# Altium PCB exp9(project.).PcbDoc
Units mm, origin at the board's own origin, x right, y up, seen from the top; angles counter-clockwise.
Board outline 152.4 x 101.6 mm, 2 copper layers (Top Layer, Bottom Layer); 42 components, 51 nets, 180 pads, 14 vias.
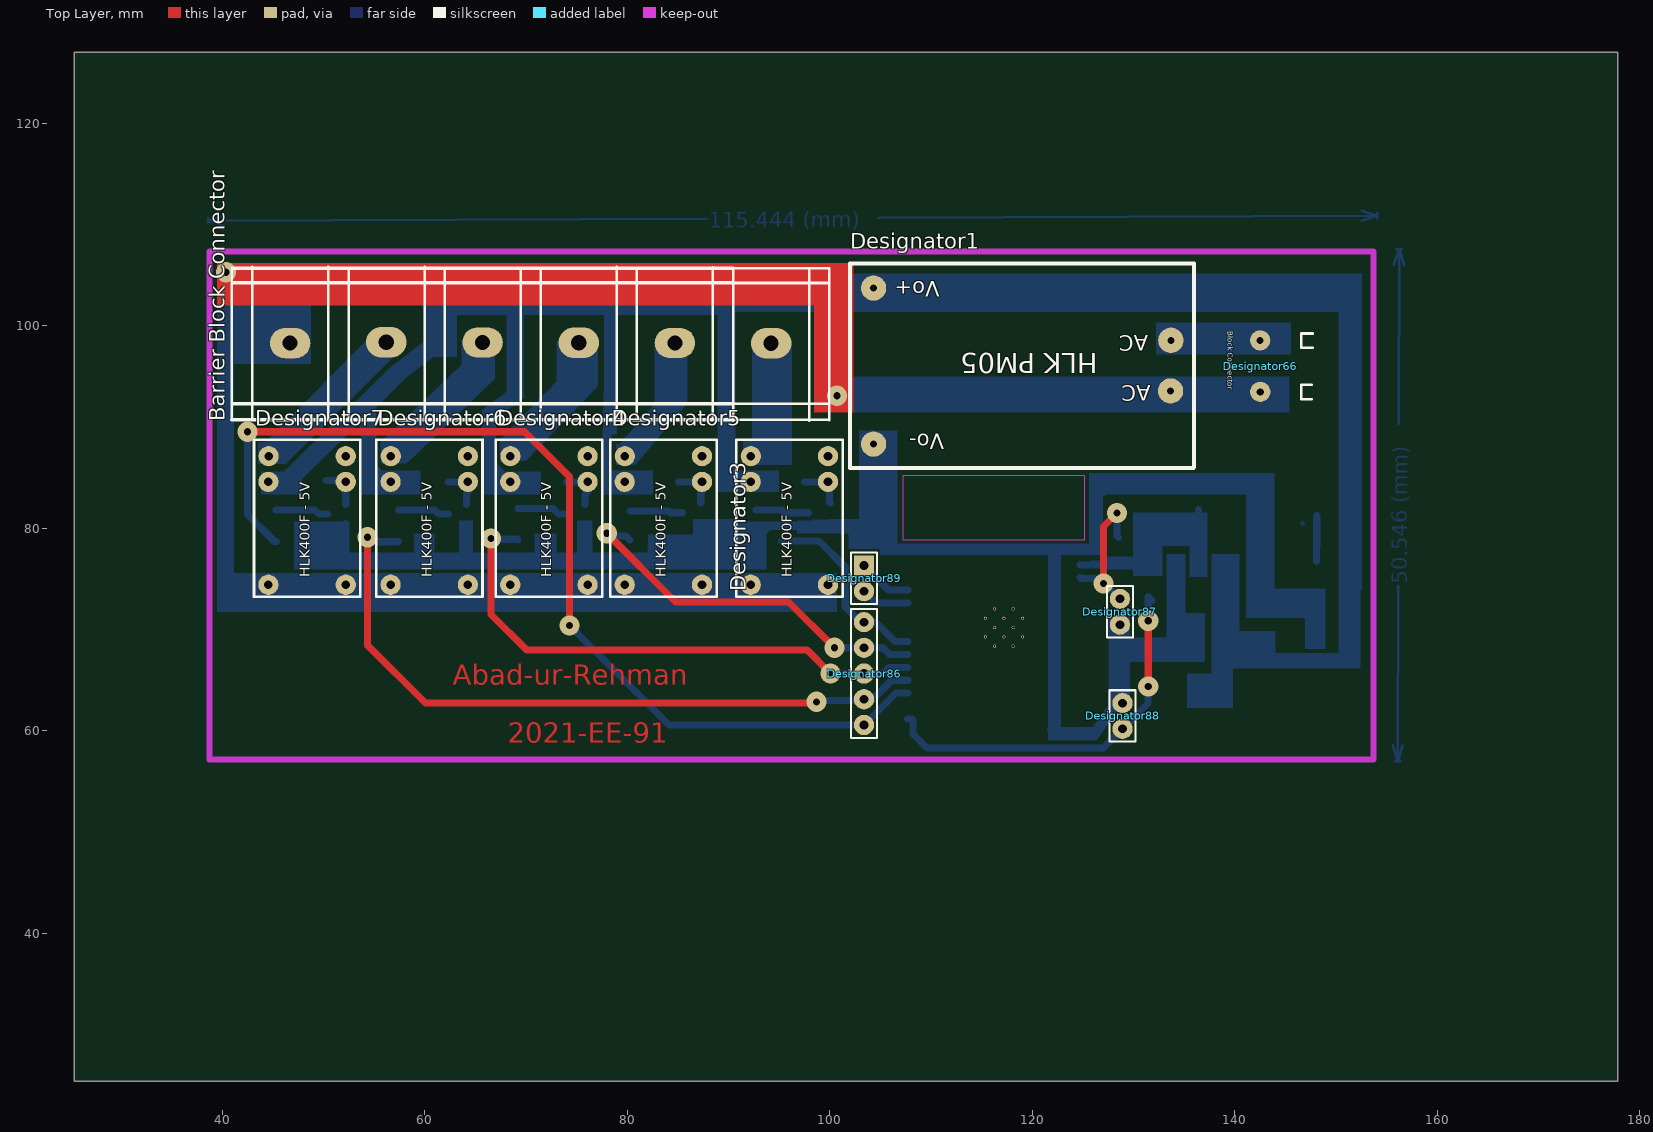
[diagram p0: Top Layer view]
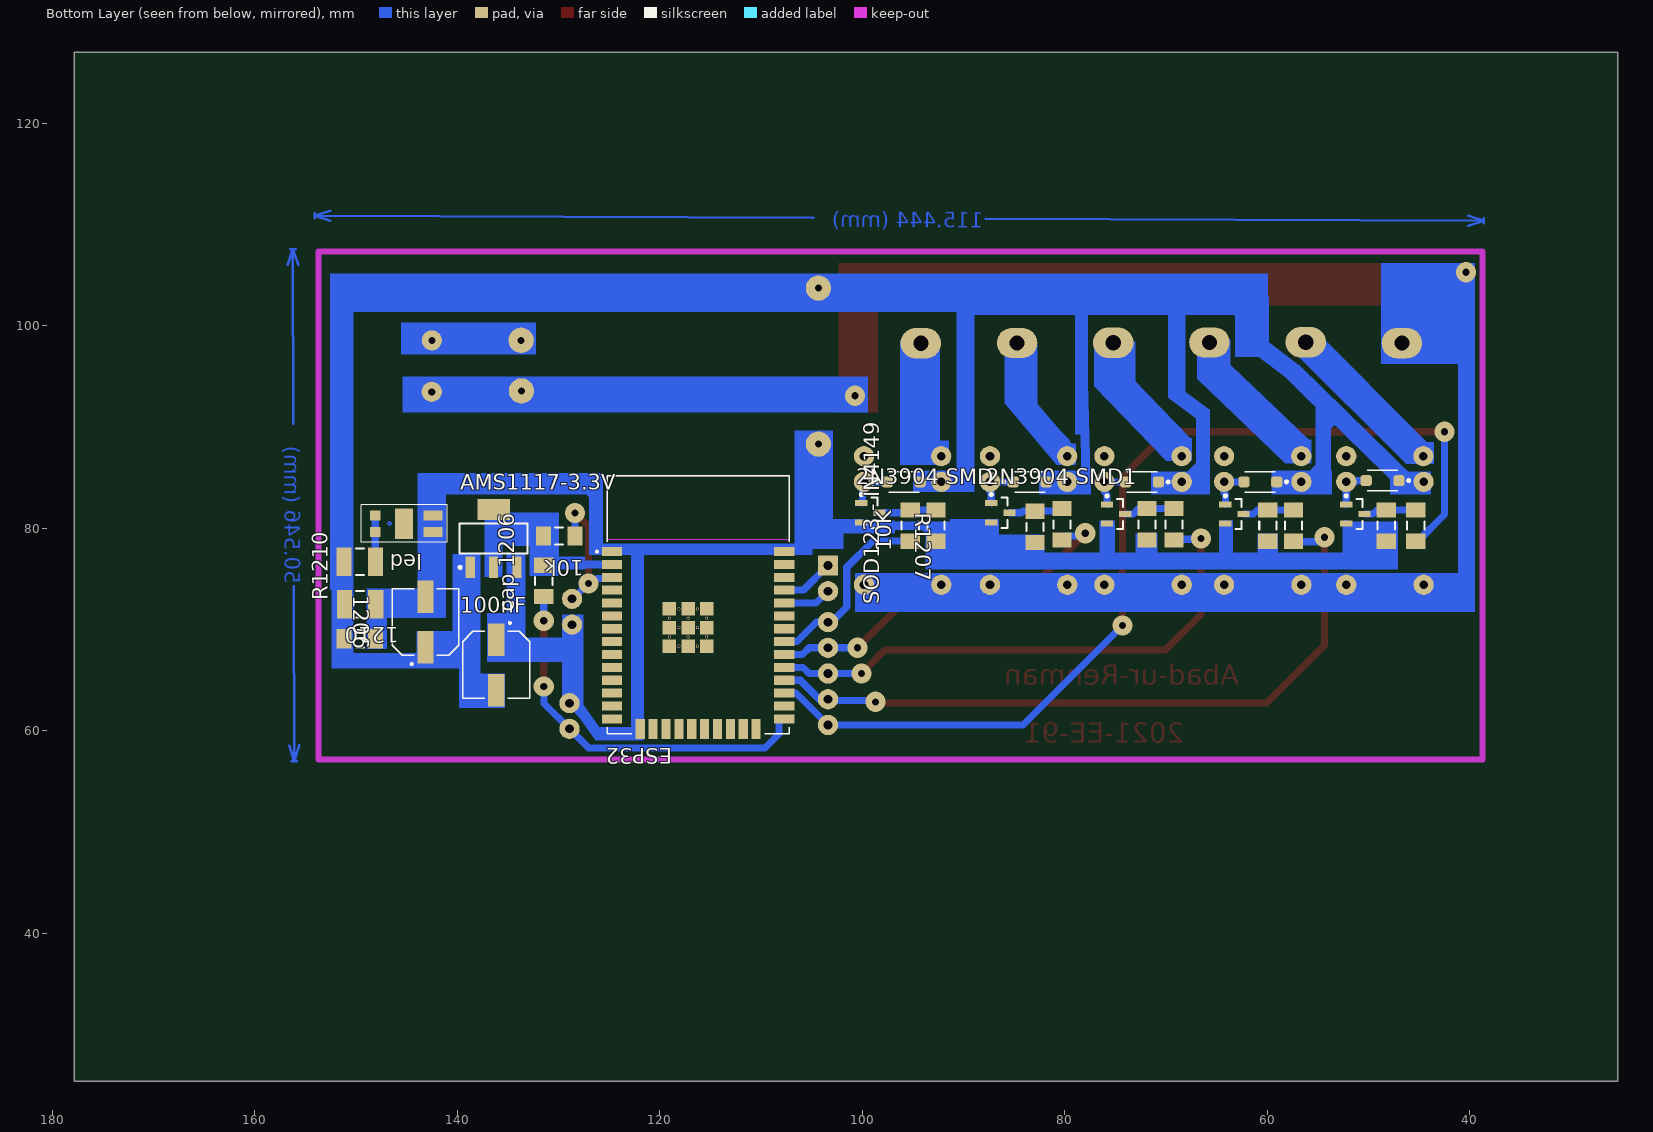
[diagram p1: Bottom Layer view, seen from below]

## Layer stack, top to bottom
Top Solder: solder mask 0.0102, Solder Resist, Dk 3.5
Top Layer: signal copper 0.0356
Dielectric 1: dielectric 0.32, FR-4, Dk 4.8
Bottom Layer: signal copper 0.0356
Bottom Solder: solder mask 0.0102, Solder Resist, Dk 3.5

## Board outline
25.4,25.4 177.8,25.4 177.8,127 25.4,127

## Design rules (kind name [scope] priority, off if disabled: settings)
Clearance [All] p1: gap=0.35 ignorepadtopadclearanceinfootprint=FALSE
PolygonConnect [All] p1: connectstyle=Relief reliefconductorwidth=0.254 reliefentries=4 polygonreliefangle="90 Angle" airgapwidth=0.254
RoutingVias [All] p1: holewidth=0.7 width=2 viastyle="Through Hole" minholewidth=0.7 minwidth=2 maxholewidth=0.7 maxwidth=2
SolderMaskExpansion [All] p1: expansion=0.102 istentingtop=FALSE
Width [All] p1: maxlimit=0.7 minlimit=0.7 preferedwidth=0.7 minimp=50.000000 maximp=50.000000 favimp=50.000000
30 further rules are at their usual default settings.

## Components (designator, comment, footprint, x,y, rotation, side; value= is the part's Value field where it differs from the comment)
"2N3904 SMD" "Comment" SOT23-3L 99.187,81.534 r180 bottom
"2N3904 SMD1" "Comment" SOT23-3L 86.36,81.534 r180 bottom
10k "Comment" RESC3216M 129.921,79.248 r180 bottom
10K "Comment" RESC3216M 95.25,80.264 r270 bottom
100nF "Comment" CAP_EEEHP1H3R3P 136.144,66.508 r270 bottom
1206 "Comment" CAPC3216M 149.606,69.088 r0 bottom
1210 "Comment" CAPC3225M 149.58,72.513 r180 bottom
AMS1117-3.3V "Comment" SOT223-4L 136.398,78.994 r90 bottom
"Barrier Block Connector" "Comment" "Barrier Block Connector" 65.709,98.329 r270 top
"cap 1206" "Comment" CAPC3216M 131.445,74.803 r270 bottom
Designator1 "Comment" HLK-PM05 118.999,96.012 r180 top
Designator3 "Comment" HLK400F-5V 96.004,80.772 r90 top
Designator4 "Comment" HLK400F-5V 72.263,80.772 r90 top
Designator5 "Comment" HLK400F-5V 83.566,80.772 r90 top
Designator6 "Comment" HLK400F-5V 60.452,80.772 r90 top
Designator7 "Comment" HLK400F-5V 48.387,80.772 r90 top
Designator66 "Comment" "PCB Block Connector" 142.748,96.012 r270 top
Designator86 "Comment" HDR1X5 103.378,60.579 r90 top
Designator87 "Comment" HDR1X2#1 128.651,73.025 r270 top
Designator88 "Comment" HDR1X2#1 128.905,62.738 r270 top
Designator89 "Comment" HDR1X2#2 103.378,76.327 r270 top
ESP32 "Comment" MODULE_ESP32-WROOM-32 116.196,72.437 r180 bottom
led "Comment" SMD-LED 145.232,80.46 r0 bottom
R1207 "Comment" RESC3216M 92.71,80.264 r90 bottom
R1210 "Comment" RESC3225M 149.606,76.708 r0 bottom
"SOD123 - IN4149" "Comment" SODFL3718X108N 95.885,84.582 r180 bottom
? "Comment" CAP_EEEHP1H3R3P 143.129,70.739 r90 bottom
? "Comment" SODFL3718X108N 48.641,84.709 r0 bottom
? "Comment" SODFL3718X108N 60.706,84.582 r0 bottom
? "Comment" SODFL3718X108N 72.39,84.582 r0 bottom
? "Comment" RESC3216M 48.26,80.264 r90 bottom
? "Comment" RESC3216M 45.339,80.264 r270 bottom
? "Comment" RESC3216M 59.944,80.264 r90 bottom
? "Comment" RESC3216M 57.404,80.264 r270 bottom
? "Comment" RESC3216M 71.882,80.391 r90 bottom
? "Comment" RESC3216M 69.215,80.391 r270 bottom
? "Comment" RESC3216M 82.931,80.137 r90 bottom
? "Comment" RESC3216M 80.264,80.391 r270 bottom
? "Comment" SOT23-3L 51.308,81.407 r180 bottom
? "Comment" SOT23-3L 63.246,81.407 r180 bottom
? "Comment" SOT23-3L 74.93,81.407 r180 bottom
? "Comment" SODFL3718X108N 83.439,84.582 r180 bottom

## Footprints (in the part's own frame and the unit in brackets; to place one, negate y for a bottom-side part, rotate by r counter-clockwise, add the part's x,y. Pads: shape width x height; smd on the part's side, far side on the other; paste and mask are expansions set on the pad)
"Barrier Block Connector" [mm] "8 pin Barrier Block Connector"
  oval 3x4 hole 1.5: 1(0.056,28.5) 2(0.031,19) 3(0.006,9.5) 4(-0.019,0) 5(-0.044,-9.5) 6(0.044,-19)
  silkscreen extent -7.47,-24.75 7.71,34.25
CAP_EEEHP1H3R3P [mm]
  rect 3.2x1.6 smd: 1(-2.5,0) 2(2.5,0)
  silkscreen extent -4.25,-3.3 3.3,3.3, body extent -3.65,-3.3 3.65,3.3, height 5.8
CAPC3216M [mm] "Chip Capacitor, Body 3.2x1.6mm, IPC Low Density"
  rect 1.5x1.9 smd: 1(-1.55,0) 2(1.55,0)
  silkscreen extent -0.4,-0.85 0.4,0.85, body extent -1.7,-0.9 1.7,0.9, height 1.35
CAPC3225M [mm] "Chip Capacitor, Body 3.2x2.5mm, IPC Low Density"
  rect 1.5x2.8 smd: 1(-1.55,0) 2(1.55,0)
  silkscreen extent -0.4,-1.3 0.4,1.3, body extent -1.7,-1.35 1.7,1.35, height 1.35
HDR1X2#1 [mm]
  round 2 hole 0.85: 1(0,0) 2(2.54,0)
  silkscreen extent -1.27,-1.27 3.81,1.27
HDR1X2#2 [mm]
  rect 2x2 hole 0.85: 1(0,0)
  round 2 hole 0.85: 2(2.54,0)
  silkscreen extent -1.27,-1.27 3.81,1.27
HDR1X5 [mm]
  round 2 hole 0.85: 1(0,0) 2(2.54,0) 3(5.08,0) 4(7.62,0) 5(10.16,0)
  silkscreen extent -1.27,-1.27 11.43,1.27
HLK400F-5V [mm]
  round 2 hole 0.85: "Coil B"(3.81,-3.818) CoilA(3.81,3.818) Common(-6.35,-3.818) Common(-6.35,3.818) NC(6.35,-3.818) NO(6.35,3.802)
  silkscreen extent -7.55,-5.26 7.95,5.24
HLK-PM05 [mm]
  round 2.5 hole 0.7: 0(-14.65,2.45) 1(-14.675,-2.55) 2(14.675,7.7) 3(14.675,-7.7)
  silkscreen extent -16.96,-10.15 17.03,10.07
MODULE_ESP32-WROOM-32 [mm]
  rect 2x0.9 smd: 1(-8.5,5.26) 2(-8.5,3.99) 3(-8.5,2.72) 4(-8.5,1.45) 5(-8.5,0.18) 6(-8.5,-1.09) 7(-8.5,-2.36) 8(-8.5,-3.63) 9(-8.5,-4.9) 10(-8.5,-6.17) 11(-8.5,-7.44) 12(-8.5,-8.71) 13(-8.5,-9.98) 14(-8.5,-11.25) 25(8.5,-11.25) 26(8.5,-9.98) 27(8.5,-8.71) 28(8.5,-7.44) 29(8.5,-6.17) 30(8.5,-4.9) 31(8.5,-3.63) 32(8.5,-2.36) 33(8.5,-1.09) 34(8.5,0.18) 35(8.5,1.45) 36(8.5,2.72) 37(8.5,3.99) 38(8.5,5.26)
  rect 0.9x2 smd: 15(-5.715,-12.25) 16(-4.445,-12.25) 17(-3.175,-12.25) 18(-1.905,-12.25) 19(-0.635,-12.25) 20(0.635,-12.25) 21(1.905,-12.25) 22(3.175,-12.25) 23(4.445,-12.25) 24(5.715,-12.25)
  rect 1.33x1.33 smd: 39_1(-2.835,-0.405) 39_2(-1,-0.405) 39_3(0.835,-0.405) 39_4(-2.835,-2.24) 39_5(-1,-2.24) 39_6(0.835,-2.24) 39_7(-2.835,-4.075) 39_8(-1,-4.075) 39_9(0.835,-4.075)
  round 0.3 hole 0.2: 39_10(-1.918,-0.405) 39_11(-0.083,-0.405) 39_12(-2.835,-1.322) 39_13(-1,-1.322) 39_14(0.835,-1.322) 39_15(-1.918,-2.24) 39_16(-0.083,-2.24) 39_17(-2.835,-3.157) 39_18(-1,-3.157) 39_19(0.835,-3.157) 39_20(-1.918,-4.075) 39_21(-0.083,-4.075)
  Keep-Out Layer region: 9,6.45 -9,6.45 -9,12.75 9,12.75
  Keep-Out Layer region: 9,6.45 -9,6.45 -9,12.75 9,12.75
  silkscreen extent -10.1,-12.75 9,12.75
"PCB Block Connector" [mm]
  round 2 hole 0.7: 1(-2.54,-0.254) 2(2.54,-0.24)
  silkscreen extent -3.22,3.82 3.26,4.96, body extent -5,-5.45 5.03,4.96, height 5.08
RESC3216M [mm] "Chip Resistor, Body 3.2x1.6mm, IPC Low Density"
  rect 1.5x1.9 smd: 1(-1.55,0) 2(1.55,0)
  silkscreen extent -0.4,-0.85 0.4,0.85, body extent -1.68,-0.87 1.68,0.87, height 0.71
RESC3225M [mm] "Chip Resistor, Body 3.2x2.5mm, IPC Low Density"
  rect 1.5x2.8 smd: 1(-1.55,0) 2(1.55,0)
  silkscreen extent -0.4,-1.3 0.4,1.3, body extent -1.68,-1.32 1.68,1.32, height 0.71
SMD-LED [mm] "SMD LED PCB"
  rect 1.9x1 smd: 2(-2.85,-0.82) led(-2.85,0.82)
  rect 1x1 smd: 3(2.85,-0.82) 4(2.85,0.82)
  rect 1.8x3 smd: 5(0,0)
  Top Layer circle w0.154: c1.441,-0.01 r0.149
  silkscreen extent -4.25,-1.84 4.25,1.82
SODFL3718X108N [mm]
  rrect50% 1.12x1.08 smd: A(1.6,0) C(-1.645,0)
  silkscreen extent -2.72,-1 1.5,1
SOT23-3L [mm] "SOT23, 3-Leads, Body 2.9x1.3mm, Pitch 0.95mm, Lead Span 2.5mm, IPC High Density"
  rect 1.2x0.6 smd: 1(-0.9,0.95) 2(-0.9,-0.95) 3(0.9,0)
  silkscreen extent -1.02,-1.5 0.7,1.92, body extent -0.7,-1.5 0.7,1.5, height 1.1
SOT223-4L [mm] "SOT223, 4-Leads, Body 6.5x3.5mm, Pitch 2.3mm, Lead Span 7mm, IPC High Density"
  rect 2.1x0.9 smd: 1(-2.85,2.3) 2(-2.85,0) 3(-2.85,-2.3)
  rect 2.1x3.2 smd: 4(2.85,0)
  silkscreen extent -2.97,-3.35 1.5,3.43, body extent -1.85,-3.35 1.85,3.35, height 1.8

## Via types
v1: diameter 2, hole 0.711, Top Layer to Bottom Layer, 12 vias
v2: diameter 2, hole 0.7, Top Layer to Bottom Layer, 2 vias

## Nets (pads, with @x,y where several pads share a name; then routed paths per layer and width w, separated by ;. In a path a pad name is that pad's centre, name@x,y a point inside that pad or via, vN(x,y) a via of type N, cw(c..) or ccw(c..) an arc to the next point about the centre after c; other vN are vias at no path point)
3.3v-91: 10k.1 "cap 1206.1" AMS1117-3.3V.2 AMS1117-3.3V.4 ESP32.2 | length 22.6
  Bottom Layer w0.7: ESP32.2 124.733,76.39 131.408,76.39 131.445,76.353 131.445,78.968 10k.1@131.471,78.994 ; 130.482,81.126 131.471,80.137 10k.1 10k.1@131.471,78.994 ; AMS1117-3.3V.2 136.398,78.994 ; AMS1117-3.3V.4 136.398,78.994 ; 10k.1@131.471,78.994 136.398,78.994
5v-91: 100nF.2 1206.2 1210.1 "SOD123 - IN4149.A" ?.1@143.129,68.239 ?.A@81.839,84.582 ?.C@46.996,84.709 ?.C@59.061,84.582 ?.C@70.745,84.582 AMS1117-3.3V.1 Designator1.3 Designator3.CoilA Designator4.CoilA Designator5.CoilA Designator6.CoilA Designator7.CoilA R1210.2 | length 244.7
  Bottom Layer w0.7: Designator7.CoilA 44.744,84.756 45.894,84.756 45.908,84.77 46.935,84.77 46.996,84.709 47.125,84.838 47.125,85.606 52.768,91.249 ; 54.038,92.519 52.768,91.249 ; 54.438,86.574 56.43,84.582 Designator6.CoilA 59.061,84.582 ?.C@59.063,84.584 ; 54.438,89.58 52.768,91.249 ; 54.483,86.804 54.483,92.075 54.895,92.487 55.276,92.487 62.606,99.817 62.606,100.807 63.189,101.39 68.409,101.39 ; 66.358,88.075 66.358,91.25 68.409,93.301 ; 66.37,88.075 66.37,86.657 Designator4.CoilA ?.C@70.745,84.582 ; 68.409,92.666 68.409,93.301 ; 68.897,97.028 68.897,93.776 68.422,93.301 68.409,93.301 ; ?.A@81.839,84.582 Designator5.CoilA 79.5,84.831 78.618,84.831 78.064,85.385 78.064,101.304 77.978,101.39 ; 94.285,84.582 Designator3.CoilA 90.455,84.582 89.852,85.184 89.852,100.788 89.25,101.39 77.978,101.39 ; Designator1.3 148.764,103.712 151.156,101.32 R1210.2 ; 100nF.2@136.525,63.787 137.445,64.707 138.655,64.707 139.065,65.117 139.065,66.611 ; AMS1117-3.3V.1 138.698,68.161 138.748,68.112 ; 138.748,66.611 138.748,68.112 ; 139.065,68.112 139.065,71.056 ; R1210.2@151.384,76.936 R1210.2 ; 68.409,93.301 68.409,101.39 ; 68.409,101.39 77.978,101.39 ; 138.748,68.112 143.002,68.112 143.129,68.239 143.129,67.633 143.579,67.183 150.876,67.183 151.156,67.463 1206.2 151.13,69.114 1210.1 151.13,74.599 151.156,74.625 R1210.2
a1-91: 
a2-91: 
a3-91: 
a4-91: 
a5-91: 
AC_gnd-91: Designator1.1 Designator66.1 | length 10.4
  Bottom Layer w0.7: Designator1.1@133.805,98.887 143.464,98.887 144.018,99.441
AC_live-91: "Barrier Block Connector.6" Designator1.0 Designator3.Common Designator4.Common Designator5.Common Designator6.Common Designator7.Common Designator66.2 | length 202.4
  Top Layer w0.7: v1(40.385,105.283) 40.737,105.283 41.943,104.076 98.775,104.076 98.938,103.914 98.938,101.341 ; 99.885,97.153 101.536,95.502 101.536,93.916 ; 99.885,98.806 99.885,95.567 101.536,93.916 ; v1(100.711,93.091) 101.536,93.916 ; 102.012,93.441 101.536,93.916
  Bottom Layer w0.7: v1(40.385,105.283) 40.385,104.802 v1@40.798,104.389 ; 45.947,99.047 46.709,98.286 40.923,98.286 40.513,97.875 40.513,74.707 40.798,74.422 44.569,74.422 Designator7.Common@52.205,74.422 ; 49.911,72.128 Designator7.Common@52.205,74.422 ; Designator3.Common@99.822,74.422 92.187,74.422 87.384,74.422 79.748,74.422 76.081,74.422 68.445,74.422 64.27,74.422 56.634,74.422 Designator7.Common@52.205,74.422 ; v1(100.711,93.091) 125.285,93.091 125.412,93.218 ; Designator1.0@133.725,93.091 133.806,93.01 138.892,93.01 138.913,92.989 143.993,92.989
b1-91: "Barrier Block Connector.1" Designator3.NO | length 12
  Bottom Layer w0.7: Designator3.NO 94.209,89.129 94.209,98.273
b2-91: "Barrier Block Connector.2" Designator5.NO | length 13.2
  Bottom Layer w0.7: Designator5.NO 79.811,87.169 79.811,88.574 84.709,93.472 84.709,98.298
b3-91: "Barrier Block Connector.3" Designator4.NO | length 14
  Bottom Layer w0.7: Designator4.NO 68.709,87.371 68.709,88.267 74.625,94.183 74.625,97.739 75.209,98.323
b4-91: "Barrier Block Connector.4" Designator6.NO | length 15
  Bottom Layer w0.7: Designator6.NO 61.356,91.828 65.71,96.182 65.71,98.348
b5-91: "Barrier Block Connector.5" Designator7.NO | length 16.7
  Top Layer w0.7: 55.836,98.373 56.209,98.373
  Bottom Layer w0.7: Designator7.NO 44.585,87.185 55.772,98.373 56.209,98.373
cb1-91: "2N3904 SMD.1" "Designator3.Coil B" "SOD123 - IN4149.C" | length 4.5
  Bottom Layer w0.7: 97.53,84.582 99.822,84.582 99.955,84.449 99.955,82.534 100.005,82.484 100.087,82.484
cb2-91: "2N3904 SMD1.1" "Designator5.Coil B" ?.C@85.084,84.582 | length 4.4
  Bottom Layer w0.7: ?.C@85.084,84.582 87.384,84.582 87.384,83.588 87.26,83.464 87.26,82.484
cb3-91: "Designator4.Coil B" ?.1@75.83,82.357 ?.A@73.99,84.582 | length 4.4
  Bottom Layer w0.7: ?.A@73.99,84.582 76.081,84.582 76.081,83.588 75.83,83.337 ?.1@75.83,82.357
cb4-91: "Designator6.Coil B" ?.1@64.146,82.357 ?.A@62.306,84.582 | length 4.2
  Bottom Layer w0.7: ?.A@62.306,84.582 64.27,84.582 64.27,83.512 64.146,83.388 ?.1@64.146,82.357
cb5-91: "Designator7.Coil B" ?.1@52.208,82.357 ?.A@50.241,84.709 | length 4.2
  Bottom Layer w0.7: ?.A@50.241,84.709 51.181,84.709 51.308,84.582 52.205,84.582 52.205,83.468 52.208,83.464 ?.1@52.208,82.357
en-91: 10k.2 Designator87.1 ESP32.3 | length 14.8
  Top Layer w0.7: v1(127.029,74.554) 127.029,80.166 v1(128.371,81.508)
  Bottom Layer w0.7: ESP32.3 124.796,75.057 126.173,75.057 126.677,74.554 v1(127.029,74.554) 127.075,74.554 128.604,73.025 Designator87.1 ; v1@128.397,81.534 v1(128.371,81.508) 10k.2 10k.2@128.511,79.108
f-91: "cap 1206.2" Designator88.2 ESP32.25 | length 38.7
  Top Layer w0.7: v1(131.445,64.389) v1(131.445,70.866)
  Bottom Layer w0.7: ESP32.25 108.107,61.187 108.207,61.087 108.207,59.687 109.601,58.293 127,58.293 Designator88.2 131.411,62.704 131.411,64.355 v1(131.445,64.389) ; v1(131.445,70.866) 131.445,73.253 131.826,72.872
gnd-91: 100nF.1 1206.1 1210.2 "2N3904 SMD1.2" "2N3904 SMD.2" ?.1@48.26,78.714 ?.1@59.944,78.714 ?.1@71.882,78.841 ?.1@82.931,78.587 ?.2@52.208,80.457 ?.2@64.146,80.457 ?.2@75.83,80.457 ?.2@143.129,73.239 AMS1117-3.3V.3 Designator1.2 Designator87.2 Designator88.1 ESP32.1 ESP32.15 ESP32.38 led.2 led.led R1207.1 | length 201.1
  Bottom Layer w0.7: 47.975,76.962 48.26,77.247 48.26,78.714 51.307,78.714 52.222,79.629 ?.2@52.208,80.457 ; ?.1@59.944,78.714 60.144,78.714 60.544,78.314 60.544,76.962 64.039,76.962 ; ?.2@64.146,80.457 64.096,80.407 64.039,80.407 64.039,76.962 ; ?.1@71.793,78.73 71.793,77.717 71.882,77.628 ; 71.945,77.978 71.945,77.691 71.882,77.628 ; ?.2@75.83,80.457 75.844,80.443 75.844,76.888 ; 87.01,80.334 87.01,80.534 87.21,80.534 87.26,80.584 ; 87.274,80.584 90.64,80.584 R1207.1@92.279,78.945 ; Designator1.2 104.324,83.444 105.252,82.516 105.252,78.359 ; ESP32.15@121.811,60.087 ESP32.15 ; Designator88.1@128.511,62.738 128.511,67.691 128.778,67.691 ; Designator87.2 128.778,70.358 128.778,67.691 ; AMS1117-3.3V.3 134.098,71.854 136.144,69.808 100nF.1 136.144,68.216 135.694,67.766 134.902,67.766 134.827,67.691 128.778,67.691 ; 1206.1 148.209,69.241 148.209,72.334 1210.2 143.579,72.513 143.129,72.963 143.129,73.239 143.129,78.893 led.led led.2 141.932,81.28 141.782,81.43 141.782,83.662 141.306,84.138 141.243,84.074 127.508,84.074 126.427,82.993 126.427,78.878 125.246,77.697 ESP32.1 121.911,77.697 ; 64.039,76.962 71.216,76.962 71.882,77.628 ; 71.882,77.628 72.675,76.835 81.921,76.835 82.331,77.245 82.331,78.187 82.731,78.587 82.931,78.587 87.477,78.587 87.835,78.945 R1207.1@92.279,78.945 ; R1207.1@92.279,78.945 92.51,78.714 R1207.1 92.91,78.714 93.31,79.114 93.31,79.464 94.01,80.164 98.021,80.164 98.391,80.534 100.037,80.534 100.087,80.584 102.169,80.584 102.743,80.01 102.743,79.375 103.759,78.359 105.252,78.359 ; 105.252,78.359 105.252,78.136 105.691,77.697 ESP32.38 121.911,77.697 ; ESP32.15 122.061,60.037 126.204,60.037 Designator88.1 128.778,62.865 128.778,67.691 ; ESP32.15 121.911,77.697
k1-91: 
k2-91: 
k3-91: 
k4-91: 
k5-91: 
led-91: led.3 led.4 R1210.1 | length 4.6
  Bottom Layer w0.7: R1210.1 148.056,78.181 148.082,78.207 led.4 led.3
m1-91: 
m2-91: 
mh1-91: 10K.2 Designator86.5 ESP32.31 | length 18.9
  Bottom Layer w0.7: 10K.2 95.276,78.74 98.933,78.74 101.522,76.151 101.522,72.243 102.453,71.313 103.026,70.739 104.521,70.739 106.453,68.807 ESP32.31
mh2-91: ?.2@80.264,78.841 Designator86.4 ESP32.30 | length 37.2
  Top Layer w0.7: v1(77.978,79.502) 84.758,72.722 95.934,72.722 v1(100.457,68.199)
  Bottom Layer w0.7: v1(77.978,79.502) 78.33,79.502 78.591,79.241 79.864,79.241 ?.2@80.264,78.841 ; v1(100.457,68.199) Designator86.4 105.231,68.199 105.893,67.537 ESP32.30
mh3-91: ?.2@69.215,78.841 Designator86.3 ESP32.29 | length 54
  Top Layer w0.7: v1(66.548,78.994) 66.548,71.501 70.048,68.001 97.734,68.001 v2(100.076,65.659)
  Bottom Layer w0.7: v1(66.548,78.994) 66.625,78.917 69.138,78.917 ?.2@69.215,78.841 ; v2(100.076,65.659) Designator86.3 105.234,65.659 105.842,66.267 ESP32.29
mh4-91: ?.2@57.404,78.714 Designator86.2 ESP32.28 | length 70.8
  Top Layer w0.7: v1(54.356,79.121) 54.356,68.453 60.071,62.738 98.552,62.738 v2(98.679,62.865) ; Designator86.2@103.188,62.928 Designator86.2
  Bottom Layer w0.7: v1(54.356,79.121) 54.708,79.121 55.155,78.674 57.364,78.674 ?.2@57.404,78.714 ; v2(98.679,62.865) 98.806,62.992 103.251,62.992 Designator86.2 104.242,63.119 106.12,64.997 ESP32.28
mh5-91: ?.2@45.339,78.714 Designator86.1 ESP32.27 | length 99.2
  Top Layer w0.7: v1(42.498,89.535) 69.85,89.535 74.295,85.09 v1(74.295,70.405)
  Bottom Layer w0.7: v1(42.498,89.535) 42.498,81.355 45.139,78.714 ?.2@45.339,78.714 ; v1(74.295,70.405) 84.121,60.579 Designator86.1 106.526,63.727 ESP32.27
nc1-91: Designator3.NC
nc2-91: Designator5.NC
nc3-91: Designator4.NC
nc4-91: Designator6.NC
nc5-91: Designator7.NC
Nc-91: 
R1-91: 10K.1 "2N3904 SMD.3" R1207.2 | length 5.3
  Bottom Layer w0.7: R1207.2 10K.1 95.53,81.534 97.906,81.534
R2-91: "2N3904 SMD1.3" ?.1@80.264,81.941 ?.2@82.931,81.687 | length 5.3
  Bottom Layer w0.7: ?.1@80.264,81.687 82.931,81.687 84.124,81.687 84.277,81.534 85.46,81.534
R3-91: ?.1@69.215,81.941 ?.2@71.882,81.941 ?.3@74.03,81.407 | length 5
  Bottom Layer w0.7: ?.1@69.215,81.941 71.882,81.941 72.694,81.941 73.228,81.407 ?.3@74.03,81.407
R4-91: ?.1@57.404,81.814 ?.2@59.944,81.814 ?.3@62.346,81.407 | length 5.1
  Bottom Layer w0.7: ?.1@57.404,81.814 59.944,81.814 60.959,81.814 61.366,81.407 ?.3@62.346,81.407
R5-91: ?.1@45.339,81.814 ?.2@48.26,81.814 ?.3@50.408,81.407 | length 5.2
  Bottom Layer w0.7: ?.1@45.339,81.814 48.26,81.814 49.148,81.814 49.555,81.407 ?.3@50.408,81.407
rxd-91: Designator89.1 ESP32.35 | length 5.3
  Bottom Layer w0.7: Designator89.1 105.818,73.887 ESP32.35
t1-91: 
t2-91: 
txd-91: Designator89.2 ESP32.34 | length 4.8
  Bottom Layer w0.7: Designator89.2 104.548,72.617 ESP32.34
vcc-91: 
pads on no net: ESP32.4 ESP32.5 ESP32.6 ESP32.7 ESP32.8 ESP32.9 ESP32.10 ESP32.11 ESP32.12 ESP32.13 ESP32.14 ESP32.16 ESP32.17 ESP32.18 ESP32.19 ESP32.20 ESP32.21 ESP32.22 ESP32.23 ESP32.24 ESP32.26 ESP32.32 ESP32.33 ESP32.36 ESP32.37 ESP32.39_1 ESP32.39_2 ESP32.39_3 ESP32.39_4 ESP32.39_5 ESP32.39_6 ESP32.39_7 ESP32.39_8 ESP32.39_9 ESP32.39_10 ESP32.39_11 ESP32.39_12 ESP32.39_13 ESP32.39_14 ESP32.39_15 ESP32.39_16 ESP32.39_17 ESP32.39_18 ESP32.39_19 ESP32.39_20 ESP32.39_21 led.5
copper on no net: | length 147.8
  Bottom Layer w0.254: 38.607,110.617 38.609,110.109 ; 40.13,110.878 38.608,110.363 ; 40.134,109.862 38.608,110.363 ; 87.798,110.579 38.608,110.363 ; 104.861,110.655 154.051,110.871 ; 152.525,111.372 154.051,110.871 ; 152.529,110.356 154.051,110.871 ; 154.05,111.125 154.052,110.617 ; 155.579,58.548 156.083,57.023 ; 155.698,106.046 156.21,107.569 ; 155.829,57.024 156.337,57.022 ; 155.956,107.57 156.464,107.568 ; 156.126,74.272 156.083,57.023 ; 156.167,90.32 156.21,107.569 ; 156.595,58.546 156.083,57.023 ; 156.714,106.044 156.21,107.569

## Keep-outs
Keep-Out Layer:
  lines w0.6: 38.735,57.15 38.735,107.315 153.67,107.315 153.67,57.15 38.735,57.15

## Other copper
Top Layer:
  rectangle net AC_live-91: 98.425,91.44 102.362,106.172
  rectangle net AC_live-91: 39.497,101.981 101.219,106.172
  text "Abad-ur-Rehman" at 62.757,64.535 h2
  text "2021-EE-91" at 68.218,58.82 h2
Bottom Layer:
  region net AC_live-91: 41.148,71.755 41.148,106.172 39.497,106.172 39.497,71.755
  rectangle net 3.3v-91: 125.73,76.073 127.762,76.835
  rectangle net 3.3v-91: 127.381,75.946 130.175,77.216
  rectangle net gnd-91: 125.603,77.343 127,85.471
  rectangle net gnd-91: 125.984,83.312 143.891,85.471
  rectangle net 5v-91: 150.241,73.914 152.527,104.013
  rectangle net 5v-91: 88.9,83.566 94.996,85.725
  rectangle net 5v-91: 88.9,83.82 90.678,102.235
  rectangle net gnd-91: 94.742,79.883 97.155,80.645
  rectangle net gnd-91: 96.774,79.502 103.251,80.772
  rectangle net gnd-91: 90.805,79.375 93.726,80.137
  rectangle net gnd-91: 90.551,79.883 94.742,80.645
  rectangle net gnd-91: 86.487,78.613 91.313,80.899
  rectangle net gnd-91: 102.87,80.518 106.68,89.662
  region net gnd-91: 126.366,59.06 129.166,63.018 128.276,63.648 125.476,59.69
  rectangle net gnd-91: 121.539,59.06 126.366,60.325
  rectangle net 5v-91: 135.255,62.23 139.827,65.659
  region net gnd-91: 148.971,74.041 143.637,74.041 143.637,71.12 148.971,71.12
  region net gnd-91: 148.971,74.041 146.939,74.041 146.939,68.072 148.971,68.072
  region net 5v-91: 144.018,69.85 139.192,69.85 139.192,66.929 144.018,66.929
  region net gnd-91: 106.68,80.899 101.854,80.899 101.854,77.978 106.68,77.978
  region net gnd-91: 127,78.486 106.553,78.486 106.553,77.343 127,77.343
  region net 3.3v-91: 132.842,81.534 129.921,81.534 129.921,75.311 132.842,75.311
  region net gnd-91: 129.667,71.501 127.508,71.501 127.508,62.23 129.667,62.23
  region net gnd-91: 122.809,78.105 121.539,78.105 121.539,59.563 122.809,59.563
  region net gnd-91: 108.712,78.486 104.902,78.486 104.902,77.343 108.712,77.343
  region net 3.3v-91: 136.652,81.534 130.683,81.534 130.683,78.232 136.652,78.232
  region net 5v-91: 140.462,77.47 137.668,77.47 137.668,66.167 140.462,66.167
  region net 5v-91: 150.622,67.691 137.668,67.691 137.668,66.167 150.622,66.167
  region net 5v-91: 152.4,78.105 150.241,78.105 150.241,66.167 152.4,66.167
  region net 3.3v-91: 137.287,81.534 135.509,81.534 135.509,75.184 137.287,75.184
  region net gnd-91: 143.891,84.074 141.097,84.074 141.097,71.12 143.891,71.12
  region net gnd-91: 135.128,77.47 133.223,77.47 133.223,68.199 135.128,68.199
  region net gnd-91: 137.033,69.215 127.889,69.215 127.889,66.802 137.033,66.802
  region net gnd-91: 137.033,71.628 134.112,71.628 134.112,68.199 137.033,68.199
  region net 5v-91: 139.827,66.548 137.668,66.548 137.668,62.611 139.827,62.611
  region net AC_gnd-91: 145.542,100.33 132.207,100.33 132.207,97.155 145.542,97.155
  region net AC_live-91: 145.415,94.996 99.441,94.996 99.441,91.44 145.415,91.44
  region net gnd-91: 64.77,75.946 64.77,80.772 63.373,80.772 63.373,75.946
  region net gnd-91: 73.025,76.454 73.025,79.502 70.866,79.502 70.866,76.454
  region net gnd-91: 76.581,76.073 76.581,80.772 75.057,80.772 75.057,76.073
  region net gnd-91: 60.96,76.073 60.96,79.502 58.928,79.502 58.928,76.073
  region net 5v-91: 152.527,101.346 152.527,105.156 59.944,105.156 59.944,101.346
  region net 5v-91: 63.189,96.901 63.189,102.87 59.817,102.87 59.817,96.901
  region net gnd-91: 59.436,75.946 59.436,77.597 47.117,77.597 47.117,75.946
  region net gnd-91: 52.578,75.946 52.578,80.645 47.117,80.645 47.117,75.946
  region net AC_live-91: 100.711,71.755 100.711,75.565 39.878,75.565 39.878,71.755
  region net 5v-91: 67.056,83.312 67.056,91.694 65.659,91.694 65.659,83.312
  region net 5v-91: 69.828,92.904 68.925,94.12 65.659,91.694 66.562,90.478
  region net b3-91: 69.984,86.64 69.984,88.9 67.437,88.9 67.437,86.64
  region net 5v-91: 78.292,83.297 78.796,101.949 77.907,101.973 77.403,83.321
  region net 5v-91: 78.994,89.281 78.994,102.108 77.724,102.108 77.724,89.281
  region net b1-91: 96.266,86.233 96.266,98.552 92.329,98.552 92.329,86.233
  region net b3-91: 69.984,86.64 77.089,93.98 74.704,96.289 67.598,88.949
  region net b1-91: 94.869,86.36 94.869,88.646 91.44,88.646 91.44,86.36
  region net b2-91: 80.774,86.256 85.934,92.277 84.058,93.885 78.897,87.864
  region net b2-91: 85.934,92.277 85.934,98.171 82.677,98.171 82.677,92.277
  region net b2-91: 80.774,86.256 80.774,88.392 78.867,88.392 78.867,86.256
  region net 5v-91: 82.55,83.312 82.55,85.725 77.724,85.725 77.724,83.312
  region net b3-91: 77.089,93.98 77.089,98.425 73.025,98.425 73.025,93.98
  region net 5v-91: 69.828,92.904 69.828,102.235 68.072,102.235 68.072,92.904
  region net gnd-91: 93.726,76.073 93.726,79.375 82.042,79.375 82.042,76.073
  region net gnd-91: 93.726,75.946 93.726,77.597 58.928,77.597 58.928,75.946
  region net AC_live-91: 48.768,96.242 48.768,106.172 39.497,106.172 39.497,96.242
  region net b5-91: 46.351,86.364 46.351,88.519 43.561,88.519 43.561,86.364
  region net 5v-91: 47.879,83.312 47.879,85.598 43.815,85.598 43.815,83.312
  region net 5v-91: 58.143,94.878 56.888,96.162 45.256,84.797 46.511,83.512
  region net b5-91: 46.351,86.364 57.718,97.73 55.563,99.886 44.196,88.519
  region net 5v-91: 55.245,83.312 55.245,92.837 53.721,92.837 53.721,83.312
  region net b4-91: 58.229,86.376 58.229,88.773 55.626,88.773 55.626,86.376
  region net 5v-91: 71.501,83.312 71.501,85.598 65.913,85.598 65.913,83.312
  region net 5v-91: 59.563,83.312 59.563,85.725 53.594,85.725 53.594,83.312
  region net b4-91: 66.929,94.742 66.929,98.679 63.627,98.679 63.627,94.742
  region net b4-91: 58.229,86.376 66.929,94.742 64.625,97.138 55.925,88.772
  region net 5v-91: 61.419,97.319 60.327,98.763 56.839,96.125 57.93,94.681
  text "115.444 (mm)" at 88.056,109.666 h1.52 r0.25
  text "50.546 (mm)" at 157.041,74.524 h1.52 r89.86

## Text inside footprints (layer, text, board x,y; h text height)
Designator1: Top Overlay "HLK PM05" at 126.443,97.272 h2 r180; Top Overlay "AC" at 131.468,99.072 h1.52 r180; Top Overlay "AC" at 131.668,94.122 h1.52 r180; Top Overlay "Vo+" at 110.868,104.397 h1.52 r180; Top Overlay "Vo-" at 111.299,89.337 h1.52 r180
Designator3: Top Overlay "HLK400F - 5V" at 96.251,75.184 h1.02 r90
Designator4: Top Overlay "HLK400F - 5V" at 72.509,75.184 h1.02 r90
Designator5: Top Overlay "HLK400F - 5V" at 83.812,75.184 h1.02 r90
Designator6: Top Overlay "HLK400F - 5V" at 60.698,75.184 h1.02 r90
Designator7: Top Overlay "HLK400F - 5V" at 48.633,75.184 h1.02 r90
Designator66: Top Overlay "Block Connector" at 139.319,99.441 h0.51 r270
ESP32: Mechanical 13 "ANTENNA" at 122.196,81.437 h1.78